# Altium PCB PCB4.PcbDoc
Units mil, origin at the board's own origin, x right, y up, seen from the top; angles counter-clockwise.
Board outline 6000 x 4000 mil, 2 copper layers (Top Layer, Bottom Layer); 19 components, 26 nets, 68 pads, 0 vias.
Unrouted connection lines stored in the file: 35.
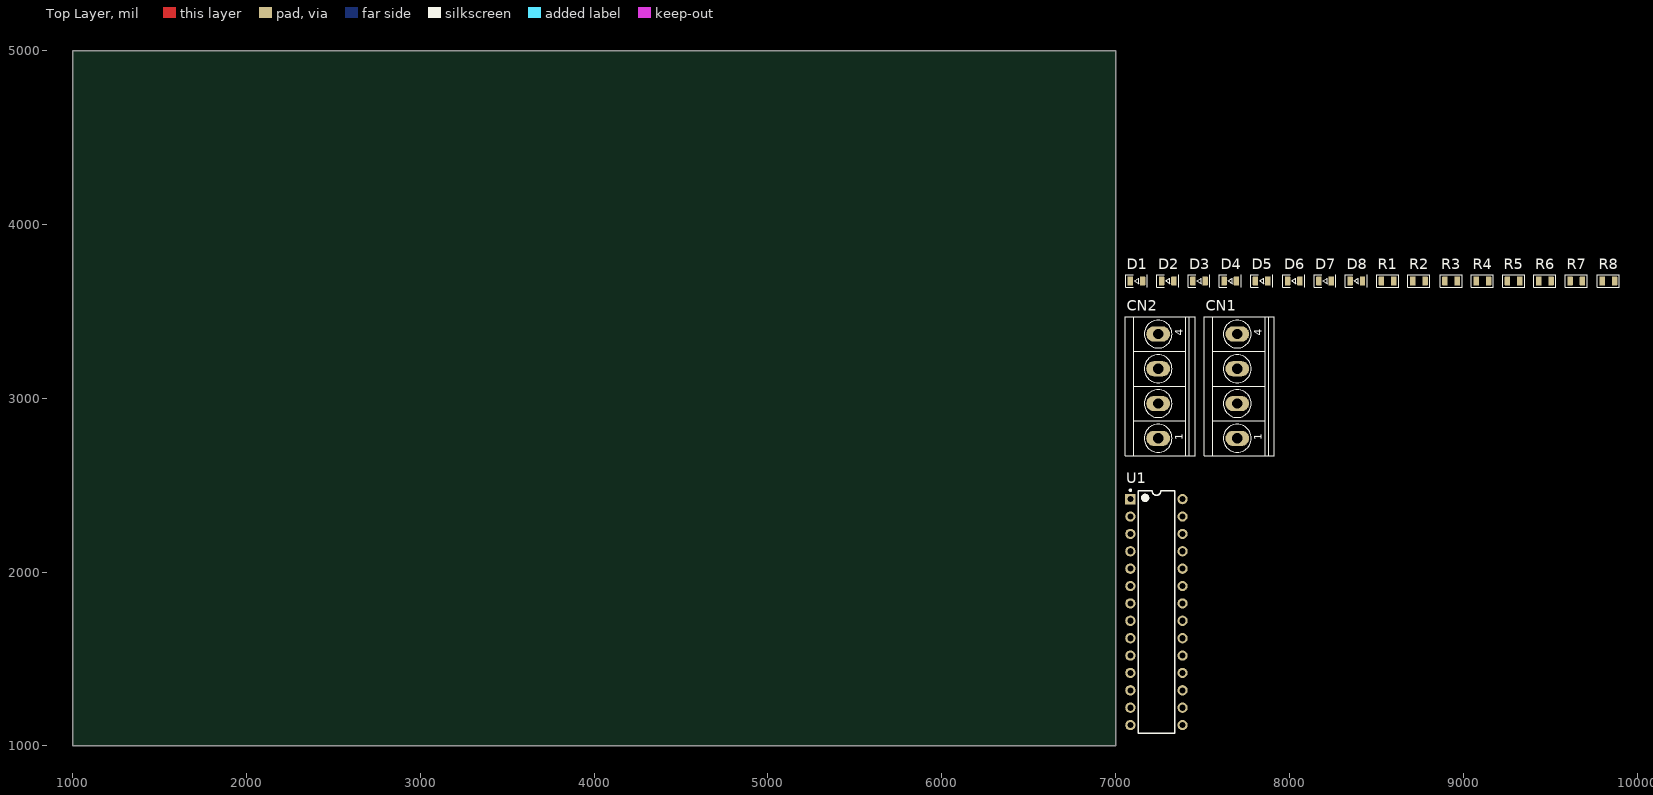
[diagram p0: Top Layer view]
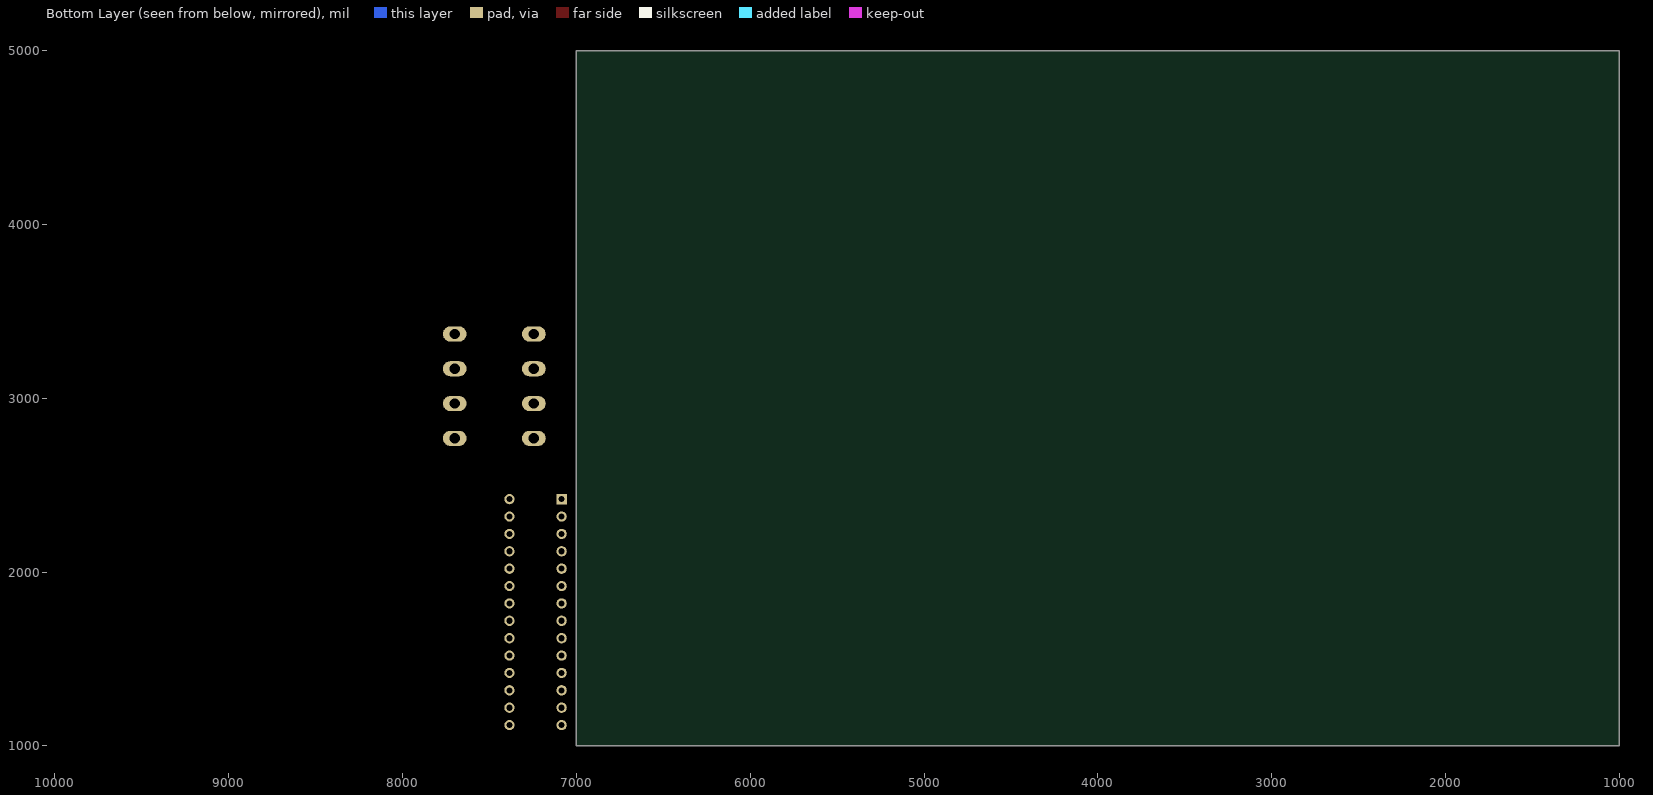
[diagram p1: Bottom Layer view, seen from below]

## Layer stack, top to bottom
Top Solder: solder mask 0.4, Solder Resist, Dk 3.5
Top Layer: signal copper 1.4
Dielectric 1: dielectric 12.6, FR-4, Dk 4.8
Bottom Layer: signal copper 1.4
Bottom Solder: solder mask 0.4, Solder Resist, Dk 3.5

## Board outline
1000,1000 7000,1000 7000,5000 1000,5000

## Design rules (kind name [scope] priority, off if disabled: settings)
Clearance [All] p1: gap=10 ignorepadtopadclearanceinfootprint=FALSE except(0: Arc-Hole Track-Hole SMDPad-Hole THPad-Hole Via-Hole Fill-Hole Poly-Hole Region-Hole Text-Hole)
PolygonConnect [All] p1: connectstyle=Relief reliefconductorwidth=10 reliefentries=4 polygonreliefangle="90 Angle" airgapwidth=10
RoomDefinition Leds [InComponentClass('Leds')] p1: confinementstyle=ConfineIn formatcopy=TRUE lockcomponents=FALSE outline 7045,3630 9910,3630 9910,3820 7045,3820
RoomDefinition Block [InComponentClass('Block')] p2: confinementstyle=ConfineIn formatcopy=TRUE lockcomponents=FALSE outline 7045,2640 7925,2640 7925,3580 7045,3580
RoomDefinition avr [InComponentClass('avr')] p3: confinementstyle=ConfineIn formatcopy=TRUE lockcomponents=FALSE outline 7045,1060 7425,1060 7425,2590 7045,2590
RoutingVias [All] p1: holewidth=28 width=50 viastyle="Through Hole" minholewidth=28 minwidth=50 maxholewidth=28 maxwidth=50
SolderMaskExpansion [All] p1: expansion=4 istentingtop=FALSE
Width [All] p1: maxlimit=10 minlimit=10 preferedwidth=10
30 further rules are at their usual default settings.

## Classes and differential pairs
net class IN[0..3]: IN0 IN1 IN2 IN3
component class Leds: D1 D2 D3 D4 D5 D6 D7 D8 R1 R2 R3 R4 R5 R6 R7 R8
component class Block: CN1 CN2
component class avr: U1

## Components (designator, comment, footprint, x,y, rotation, side; value= is the part's Value field where it differs from the comment)
CN1 "TB-04" TB508-04 7700,3070 r90 top
CN2 "TB-04" TB508-04 7245,3070 r90 top
D1 "LED" LED-0805 7120,3675 r0 top
D2 "LED" LED-0805 7300,3675 r0 top
D3 "LED" LED-0805 7480,3675 r0 top
D4 "LED" LED-0805 7660,3675 r0 top
D5 "LED" LED-0805 7840,3675 r0 top
D6 "LED" LED-0805 8025,3675 r0 top
D7 "LED" LED-0805 8205,3675 r0 top
D8 "LED" LED-0805 8385,3675 r0 top
R1 "1k0" R0805 8565,3675 r0 top
R2 "1k0" R0805 8745,3675 r0 top
R3 "1k0" R0805 8930,3675 r0 top
R4 "1k0" R0805 9110,3675 r0 top
R5 "1k0" R0805 9290,3675 r0 top
R6 "1k0" R0805 9470,3675 r0 top
R7 "1k0" R0805 9650,3675 r0 top
R8 "1k0" R0805 9835,3675 r0 top
U1 "ATmega328-PU" 28P3 7235,1770 r0 top

## Footprints (in the part's own frame and the unit in brackets; to place one, negate y for a bottom-side part, rotate by r counter-clockwise, add the part's x,y. Pads: shape width x height; smd on the part's side, far side on the other; paste and mask are expansions set on the pad)
28P3 [mm] "28-Pin Plastic Dual In-Line Package (PDIP)"
  rect 1.5x1.5 hole 0.9: 1(-3.81,16.51)
  round 1.5 hole 0.9: 2(-3.81,13.97) 3(-3.81,11.43) 4(-3.81,8.89) 5(-3.81,6.35) 6(-3.81,3.81) 7(-3.81,1.27) 8(-3.81,-1.27) 9(-3.81,-3.81) 10(-3.81,-6.35) 11(-3.81,-8.89) 12(-3.81,-11.43) 13(-3.81,-13.97) 14(-3.81,-16.51) 15(3.81,-16.51) 16(3.81,-13.97) 17(3.81,-11.43) 18(3.81,-8.89) 19(3.81,-6.35) 20(3.81,-3.81) 21(3.81,-1.27) 22(3.81,1.27) 23(3.81,3.81) 24(3.81,6.35) 25(3.81,8.89) 26(3.81,11.43) 27(3.81,13.97) 28(3.81,16.51)
  silkscreen extent -3.93,-17.7 2.65,17.93, body extent -3.6,-17.65 3.6,17.65, height 4.58
LED-0805 [mm] "SMT LED DIODE 0805"
  rrect25% 0.8x1.3 smd: 1(-0.9,0) 2(0.9,0)
  silkscreen extent -1.6,-0.9 1.6,0.9, body extent -1.01,-0.62 1.01,0.63, height 1.1
R0805 [mm] "SMD RESISTOR 0805"
  rrect25% 0.8x1.3 smd: 1(-0.9,0) 2(0.9,0)
  silkscreen extent -1.6,-0.9 1.6,0.9, body extent -1,-0.62 1,0.63, height 0.45
TB508-04 [mm] "Vertical terminal block 0.2 inch (5.08mm) pitch"
  oval 2.2x3.5 hole 1.5: 1(-7.62,0) 2(-2.54,0) 3(2.54,0) 4(7.62,0)
  silkscreen extent -10.16,-5.4 10.16,4.8, body extent -10.7,-4.67 10.19,4.83, height 15.03

## Part data
CN1 CN2: "Terminal Block"
D1 D2 D3 D4 D5 D6 D7 D8: "LED - Light-Emitting Diode"
R1 R2 R3 R4 R5 R6 R7 R8: library part Resistor, "Single resistor", Power=0.125W, Unit price=0.1
U1: library part CMP-0095-00015-2, "8-bit AVR Microcontroller, 32KB Flash, 1KB EEPROM, 2KB SRAM, 28-pin PDIP, Industrial Grade (-40°C to 85°C)", ComponentLink1Description="Manufacturer URL", ComponentLink1URL=http://www.atmel.com/, ComponentLink2Description="ATmega48A/48PA/88A/88PA/168A/168PA/328/328P Datasheet", ComponentLink2URL=http://www.atmel.com/dyn/resources/prod_documents/8271.pdf, ComponentLink3Description="ATmega48A/48PA/88A/88PA/168A/168PA/328/328P Summary", ComponentLink3URL=http://www.atmel.com/dyn/resources/prod_documents/8271S.pdf, DatasheetVersion="revD, May-2011", PackageDescription="28-lead (0.300\"/7.62mm Wide) Plastic Dual Inline Package (PDIP)", PackageReference=28P3, PackageVersion="revB, Sep-2001", RevisionNote="DatasheetVersion updated. URLs added."

## Nets (pads, with @x,y where several pads share a name; then routed paths per layer and width w, separated by ;. In a path a pad name is that pad's centre, name@x,y a point inside that pad or via, vN(x,y) a via of type N, cw(c..) or ccw(c..) an arc to the next point about the centre after c; other vN are vias at no path point)
GND: D1.1 D2.1 D3.1 D4.1 D5.1 D6.1 D7.1 D8.1 U1.8 U1.22
IN0: CN1.1 U1.14
IN1: CN1.2 U1.15
IN2: CN1.3 U1.16
IN3: CN1.4 U1.17
In5: CN2.2 U1.19
In6: CN2.3 U1.9
In7: CN2.4 U1.10
NetCN2_1: CN2.1 U1.18
NetD1_2: D1.2 R1.1
NetD2_2: D2.2 R2.1
NetD3_2: D3.2 R3.1
NetD4_2: D4.2 R4.1
NetD5_2: D5.2 R5.1
NetD6_2: D6.2 R6.1
NetD7_2: D7.2 R7.1
NetD8_2: D8.2 R8.1
Out0: R1.2 U1.2
Out1: R2.2 U1.3
Out2: R3.2 U1.4
Out3: R4.2 U1.5
Out4: R5.2 U1.6
Out5: R6.2 U1.11
Out6: R7.2 U1.12
Out7: R8.2 U1.13
VCC: U1.7 U1.20 U1.21
pads on no net: U1.1 U1.23 U1.24 U1.25 U1.26 U1.27 U1.28

## Text inside footprints (layer, text, board x,y; h text height)
CN1: Top Overlay "1" at 7840,2760 h43.31 r90; Top Overlay "4" at 7840,3360 h43.31 r90
CN2: Top Overlay "1" at 7385,2760 h43.31 r90; Top Overlay "4" at 7385,3360 h43.31 r90